# Altium PCB AGRSHUB_PCB.PcbDoc (part 1 of 2)
Units mil, origin at the board's own origin, x right, y up, seen from the top; angles counter-clockwise.
Board outline 4405 x 3410 mil, 2 copper layers (Top Layer, Bottom Layer); 159 components, 148 nets, 602 pads, 103 vias.
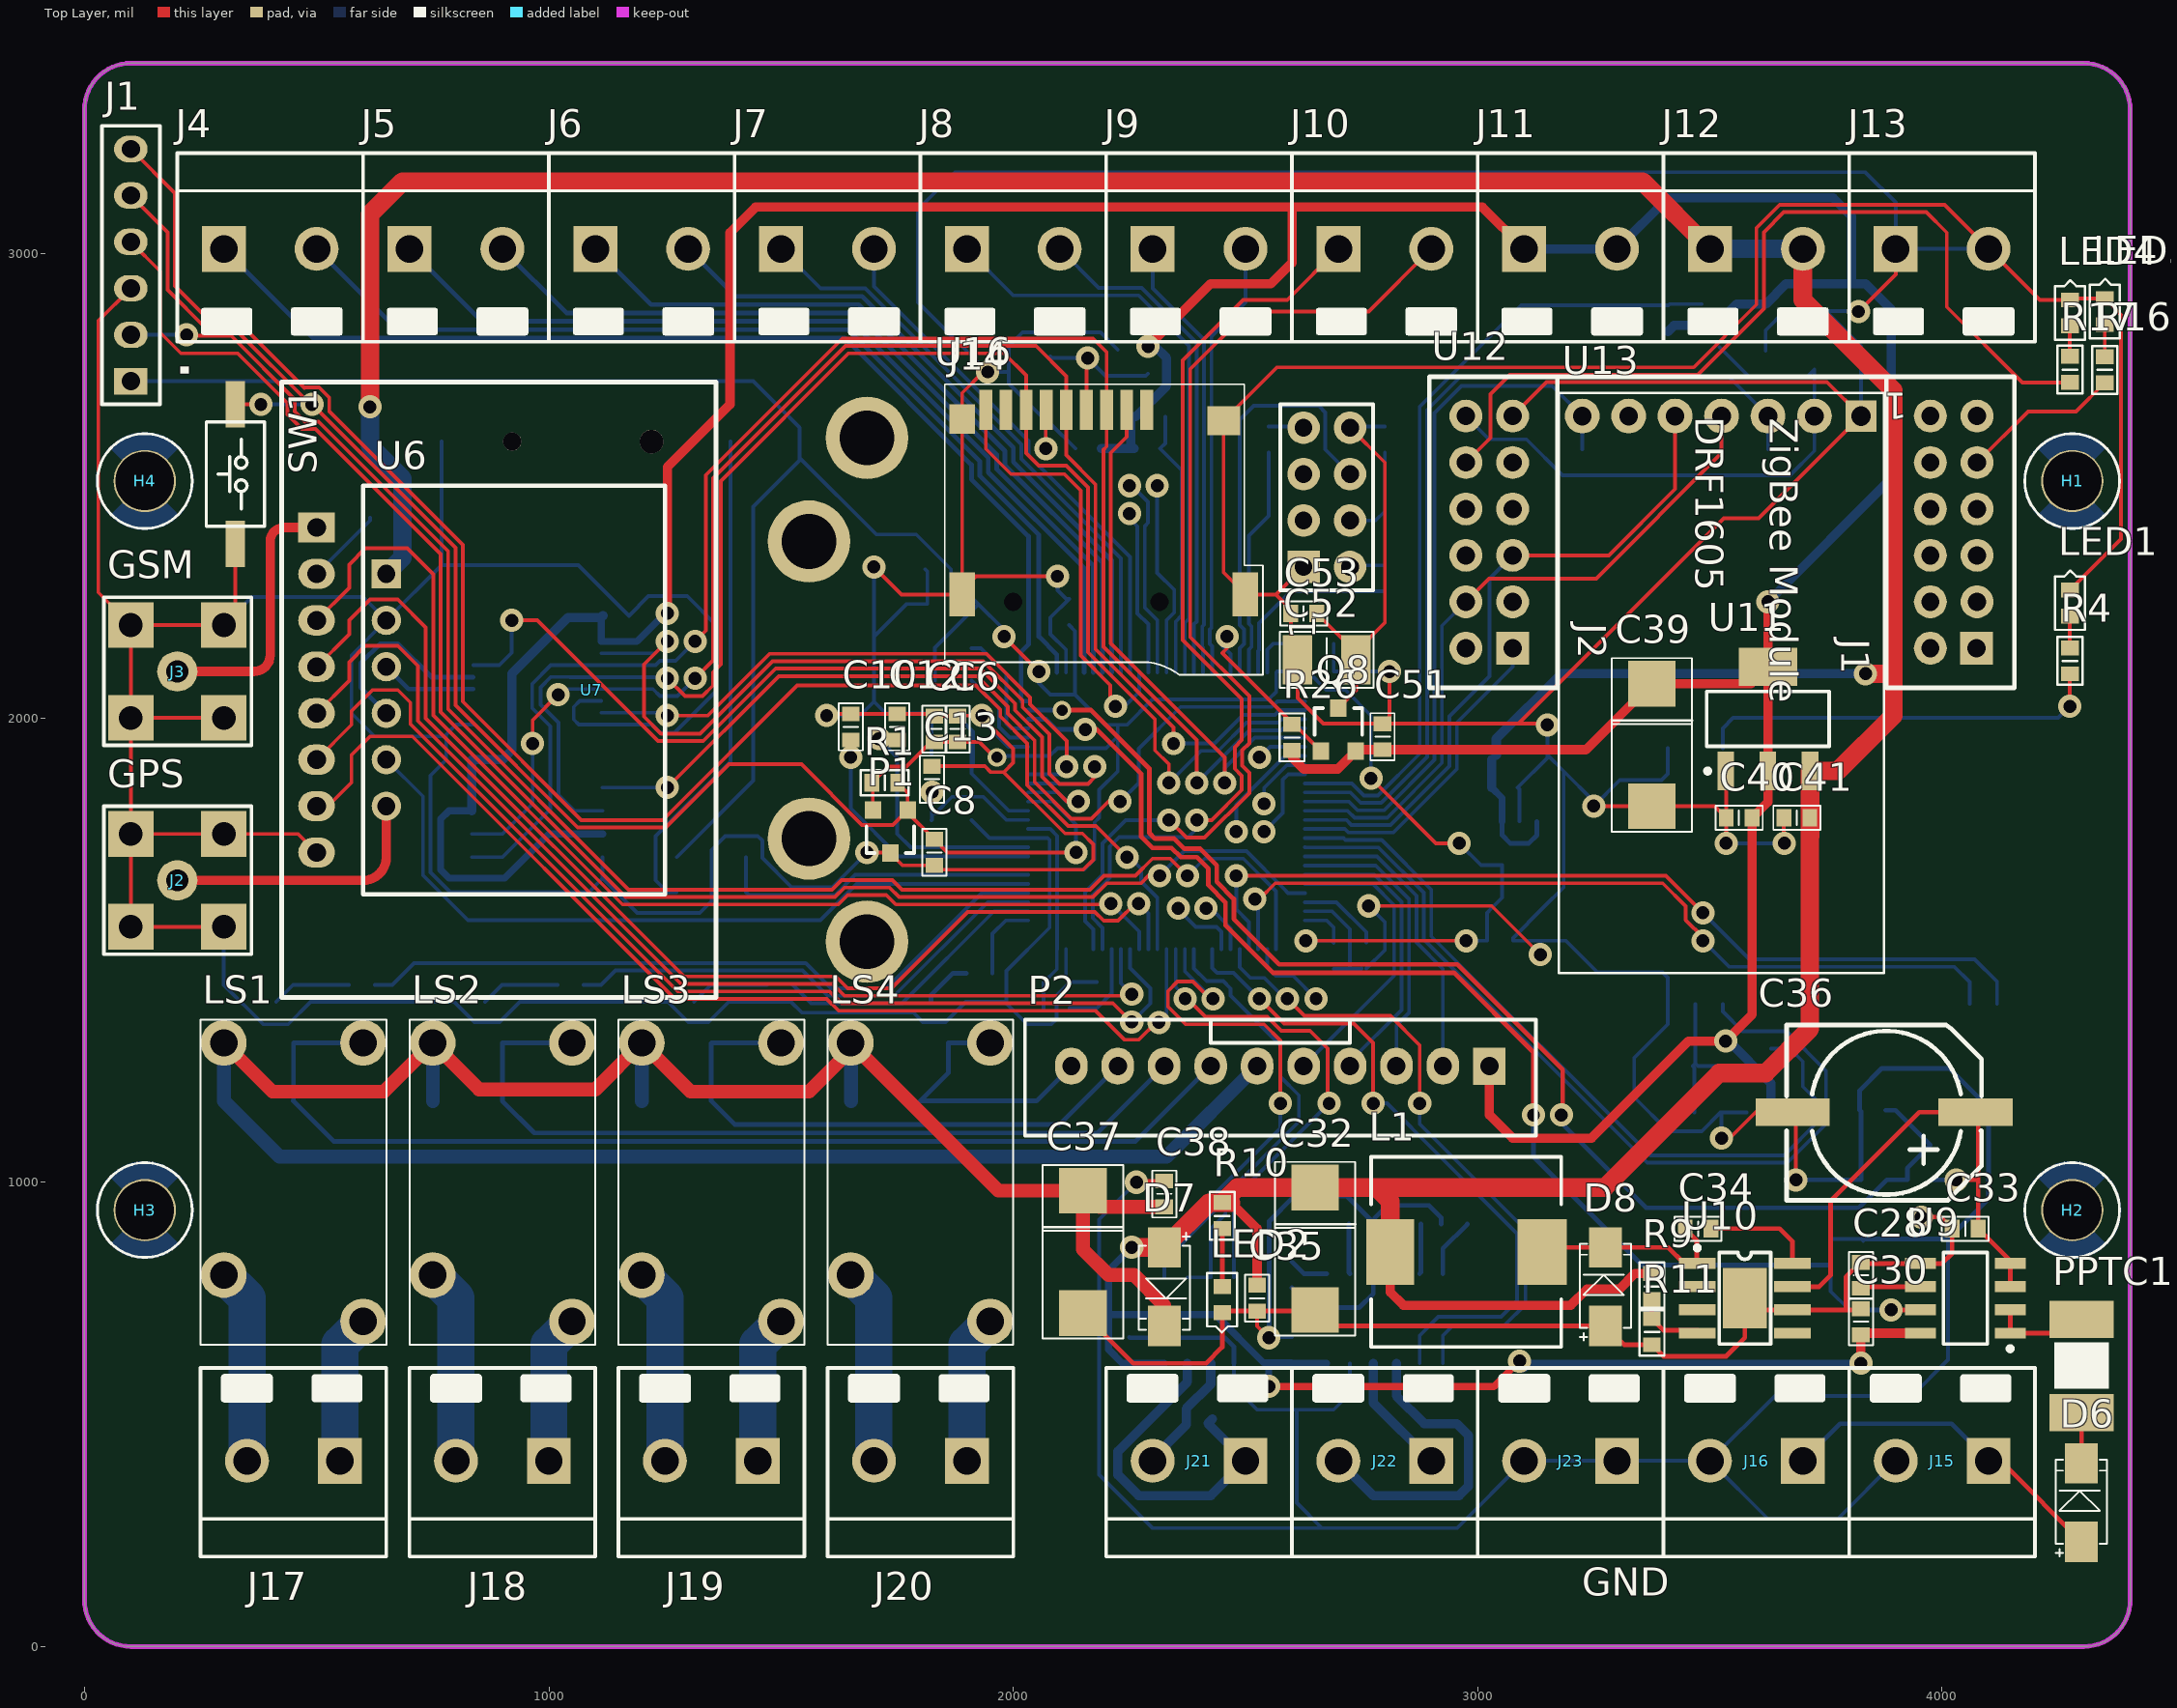
[diagram p0: Top Layer view]
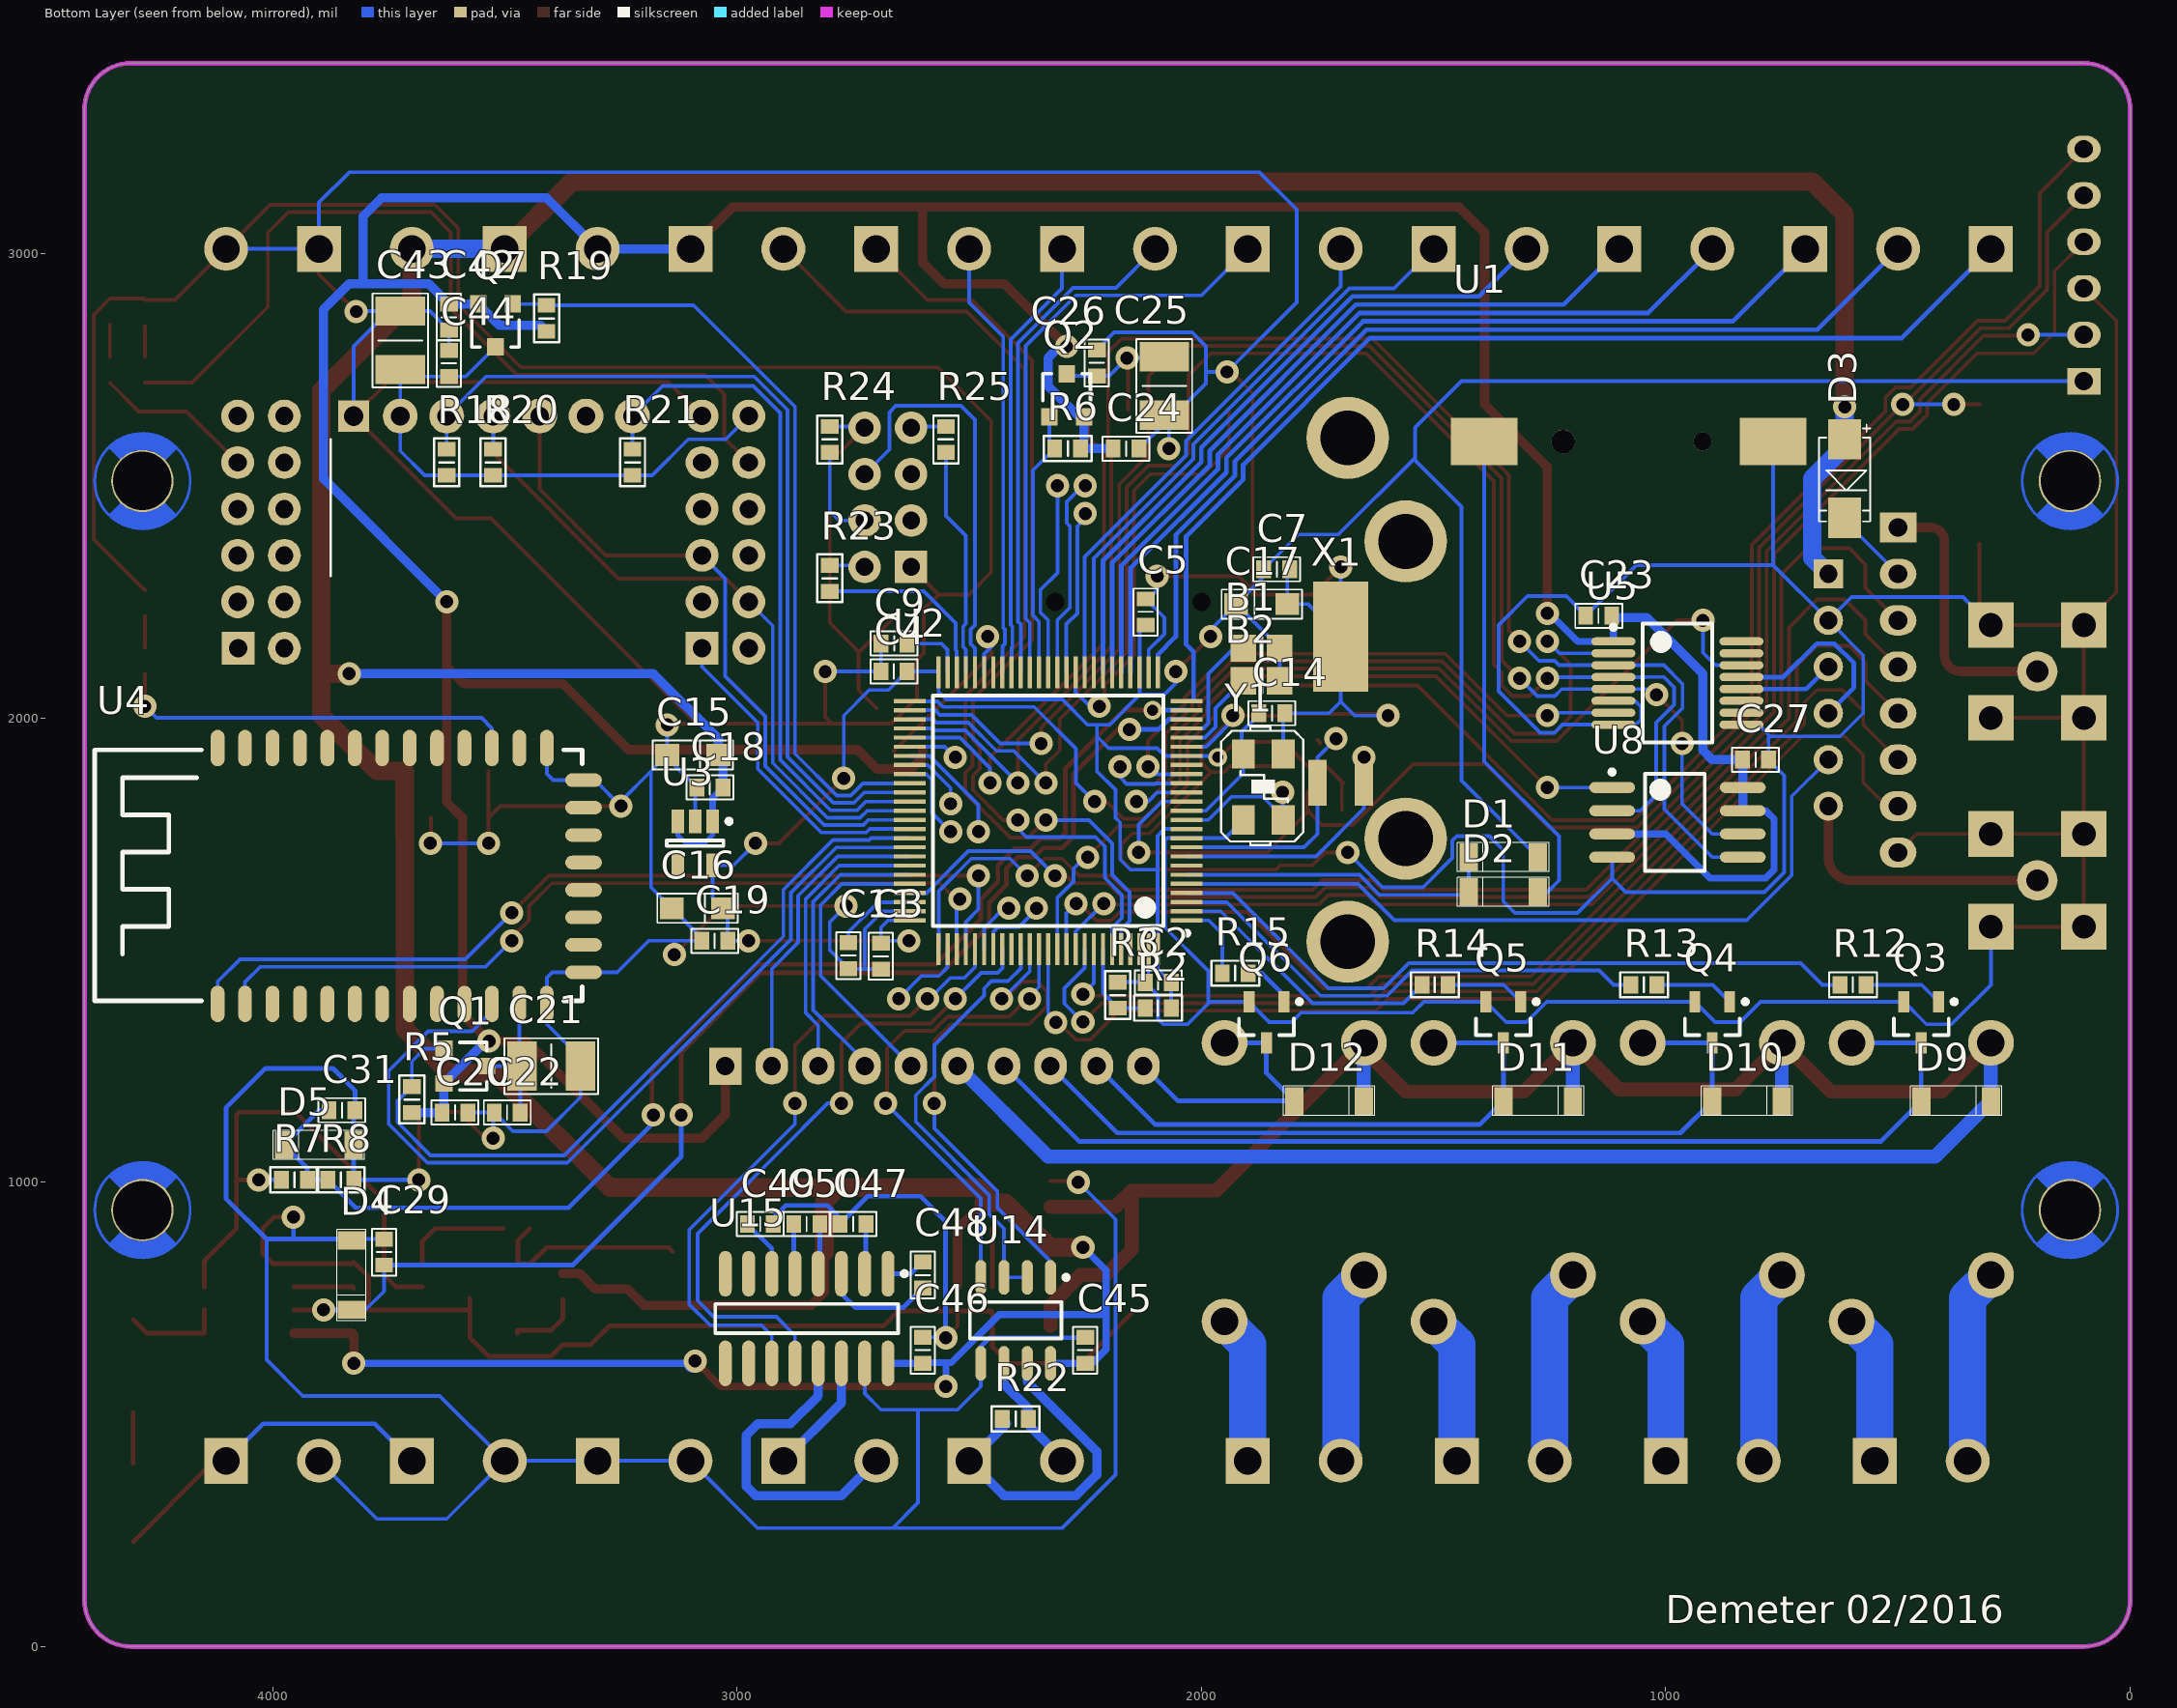
[diagram p1: Bottom Layer view, seen from below]
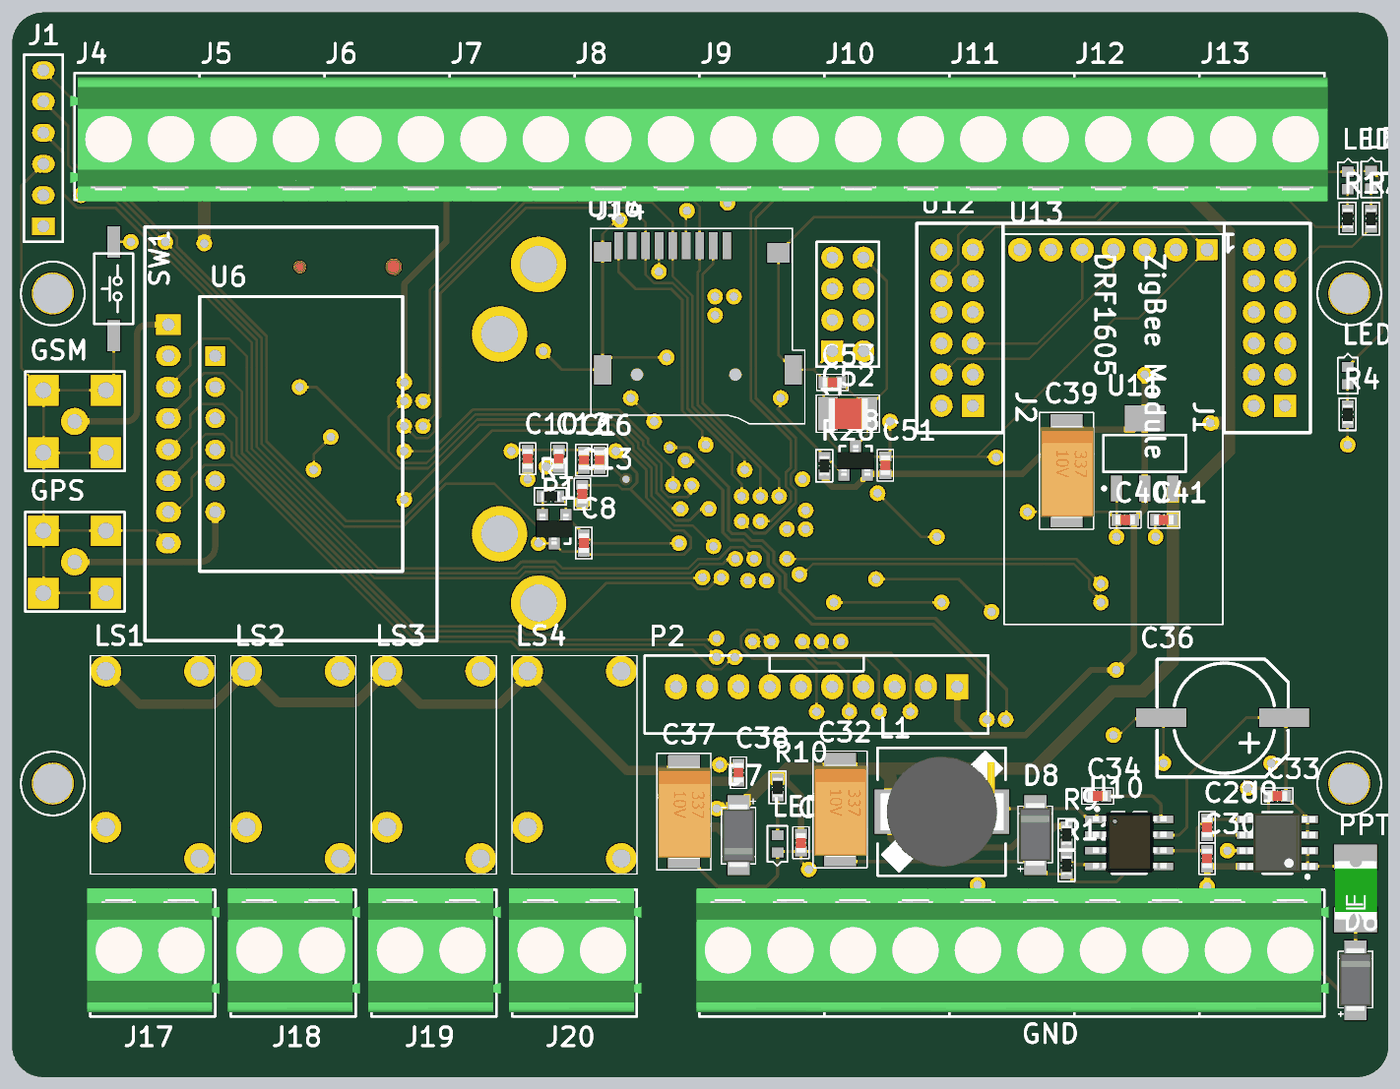
[diagram p3: 3D render of the assembled board from above, using the file's embedded part models]
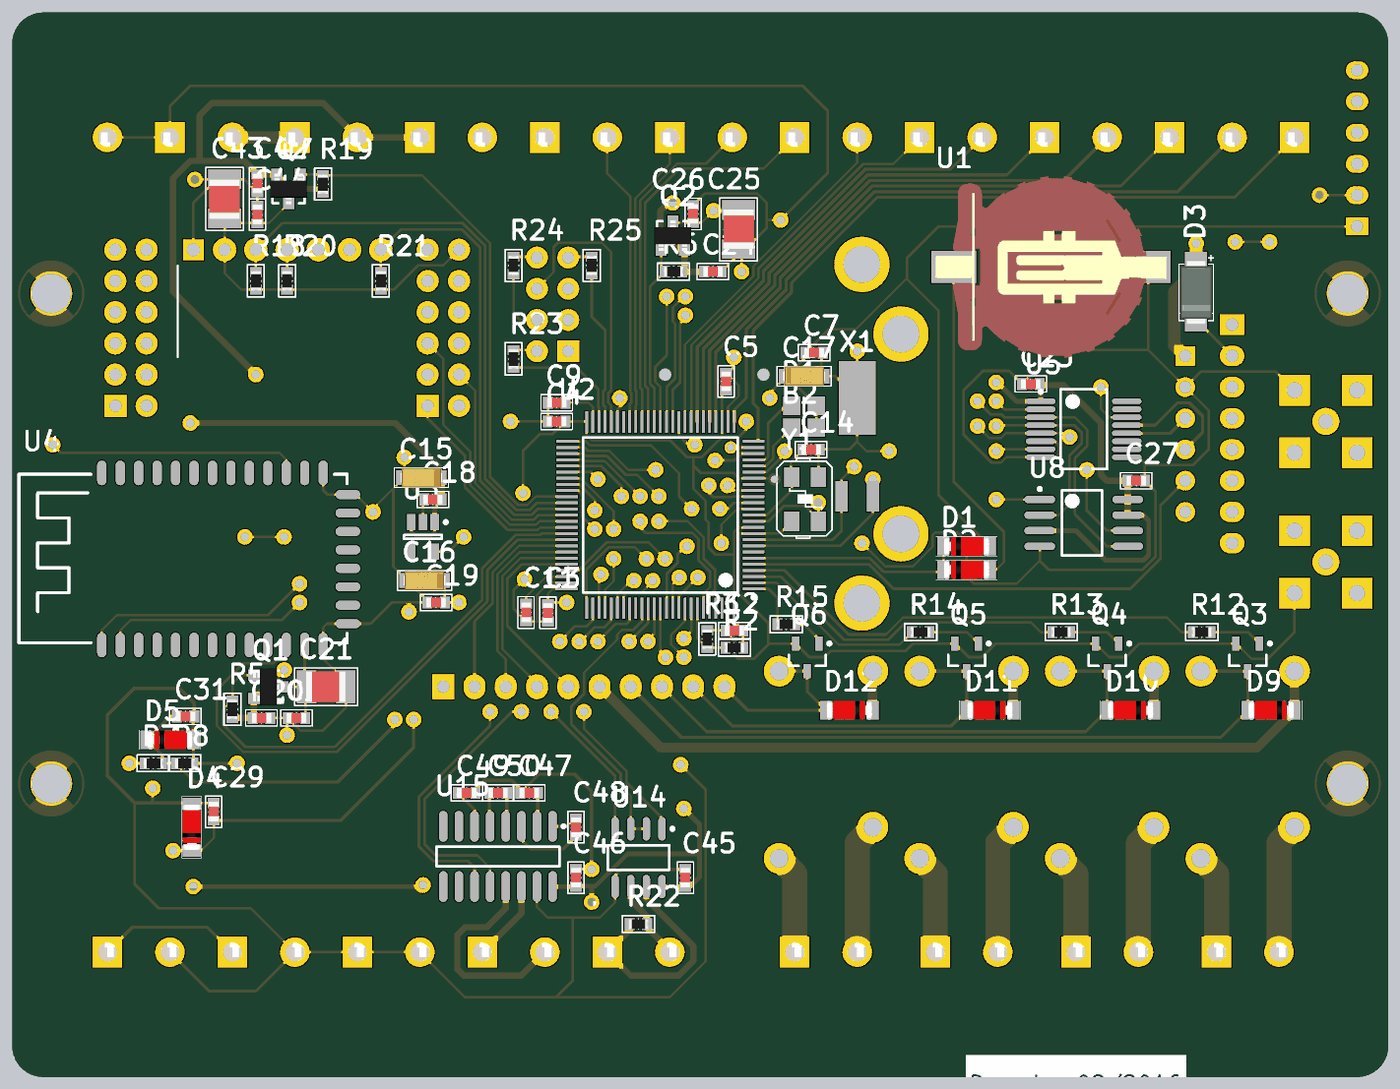
[diagram p4: 3D render of the assembled board from below, using the file's embedded part models]

## Layer stack, top to bottom
Top Solder: solder mask 0.4, Solder Resist, Dk 3.5
Top Layer: signal copper 1.4
Dielectric 1: dielectric 12.6, FR-4, Dk 4.8
Bottom Layer: signal copper 1.4
Bottom Solder: solder mask 0.4, Solder Resist, Dk 3.5

## Board outline
0,100 0,3310 cw(c100,3310) 100,3410 4305,3410 cw(c4305,3310) 4405,3310 4405,100 cw(c4305,100) 4305,0 100,0 cw(c100,100)

## Design rules (kind name [scope] priority, off if disabled: settings)
Clearance [All] p1: gap=8 except(7: SMDPad-SMDPad)
ComponentClearance [All] p1: gap=0 collisioncheckmode=3 verticalgap=0 showdistances=FALSE
PolygonConnect [All] p1: connectstyle=Relief reliefconductorwidth=10 reliefentries=4 polygonreliefangle="90 Angle" airgapwidth=10
RoutingVias [All] p1: holewidth=28 width=50 viastyle="Through Hole" minholewidth=28 minwidth=50 maxholewidth=28 maxwidth=50
SolderMaskExpansion [All] p1: expansion=4
Width [All] p1: maxlimit=100 minlimit=8 preferedwidth=8
29 further rules are at their usual default settings.

## Classes and differential pairs
component class WIFI: C51 C52 C53 Q8 R23 R24 R25 R26 U16
component class RSxx: C45 C46 C47 C48 C49 C50 J21 J22 J23 R22 U14 U15
component class RF: C42 C43 C44 LED3 LED4 Q7 R16 R17 R18 R19 R20 R21 U12 U13
component class RELAY: D9 D10 D11 D12 J17 J18 J19 J20 LS1 LS2 LS3 LS4 Q3 Q4 Q5 Q6 R12 R13 R14 R15
component class POWER: C28 C29 C30 C31 C32 C33 C34 C35 C36 C37 C38 C39 C40 C41 D4 D5 D6 D7 D8 J15 J16 L1 LED2 PPTC1 R7 R8 R9 R10 R11 U9 U10 U11
component class MEMORY: C24 C25 C26 C27 J14 Q2 R6 U8
component class INPUT: J4 J5 J6 J7 J8 J9 J10 J11 J12 J13
component class HOLE: H1 H2 H3 H4
component class GSM: D3 J3 U7
component class GPS: C23 J2 U5 U6
component class DISPLAY: P2
component class BLE: C20 C21 C22 LED1 Q1 R4 R5 U4
component class AGRSHub_Sche: B1 B2 C1 C2 C3 C4 C5 C6 C7 C8 C9 C10 C11 C12 C13 C14 C15 C16 C17 C18 C19 D1 D2 J1 P1 R1 R2 R3 SW1 U1 U2 U3 X1 Y1

## Components (designator, comment, footprint, x,y, rotation, side; value= is the part's Value field where it differs from the comment)
B1 "BEAD" 0805_M 1870.63,2150 r0 bottom
B2 "BEAD" 0805_M 1870.63,2080 r0 bottom
C1 "104" C0603 1830,1976.56 r270 top
C2 "104" C0603 2093.44,1430 r180 bottom
C3 "104" C0603 2690,1486.56 r90 bottom
C4 "104" C0603 2662.44,2100 r180 bottom
C5 "104" C0603 2120,2228.44 r270 bottom
C6 "104" C0603 1880,1976.56 r270 top
C7 "10 uF" C0603 1837.56,2320 r0 bottom
C8 "104" C0603 1830,1710 r90 top
C9 "105" C0603 2661.56,2160 r0 bottom
C10 "10p" C0603 1650,1980 r90 top
C11 "105" C0603 2760,1488.44 r270 bottom
C12 "10p" C0603 1750,1980 r90 top
C13 "10p" C0603 1825,1868.44 r270 top
C14 "10p" C0603 1847.56,2010 r0 bottom
C15 "Cap_TANTA" CAP_TANTA_SMD_10UF/10V/16V 3095.07,1920 r90 bottom
C16 "10 uF" CAP_TANTA_SMD_10UF/10V/16V 3085.07,1590 r90 bottom
C17 "10 uF" CAP_TANTA_SMD_10UF/10V/16V 1870,2245 r270 bottom
C18 "104" C0603 3058.44,1850 r180 bottom
C19 "104" C0603 3048.44,1520 r180 bottom
C20 "104" C0603 3606.56,1150 r0 bottom
C21 "10 uF" C1210 3400,1250 r0 bottom
C22 "104" C0603 3495,1150 r180 bottom
C23 "104" C0603 1145,2220 r180 bottom
C24 "104" C0603 2161.56,2580 r0 bottom
C25 "10 uF" C1210 2080,2715 r90 bottom
C26 "104" C0603 2225,2765 r270 bottom
C27 "104" C0603 806.56,1910 r0 bottom
C28 "103" C0603 3825,800 r270 top
C29 "103" C0603 3760,850 r270 bottom
C30 "104" C0603 3825,700 r270 top
C31 "103" C0603 3850,1155 r0 bottom
C32 "100 uF" CAP_TANTA_SMD_100UF/16V 2650,856.77 r180 top
C33 "104" C0603 4050,900 r180 top
C34 "470 pF" C0603 3475,900 r180 top
C35 "104" C0603 2525,750 r90 top
C36 "100 uF/35V" "CAP_AL_SMD (10X10.2)" 3875,1150 r180 top
C37 "100 uF" CAP_TANTA_SMD_100UF/16V 2150,850 r180 top
C38 "104" C0603 2325,975 r270 top
C39 "10 uF" CAP_TANTA_SMD_100UF/16V 3375,1941.77 r180 top
C40 "104" C0603 3562.56,1785 r0 top
C41 "104" C0603 3686.56,1785 r0 top
C42 "104" C0603 3620,2862.56 r90 bottom
C43 "10 uF" C1210 3725,2812.99 r270 bottom
C44 "104" C0603 3620,2763.44 r270 bottom
C45 "104" C0603 2250,638.44 r270 bottom
C46 "105" C0603 2600,638.44 r270 bottom
C47 "105" C0603 2750,910 r0 bottom
C48 "105" C0603 2600,800 r90 bottom
C49 "105" C0603 2950,910 r180 bottom
C50 "105" C0603 2850,910 r180 bottom
C51 "104" C0603 2795,1960 r270 top
C52 "10 uF" C1210 2675,2125 r0 top
C53 "104" C0603 2625,2225 r0 top
D1 "B340A" DO_213AA 1350,1700 r0 bottom
D2 "B340A" DO_213AA 1350,1625 r0 bottom
D3 "SS34" "DO-214AC (SMA)" 615,2515.43 r270 bottom
D4 "3V3" DO_213AA 3830,800 r270 bottom
D5 "3V3" DO_213AA 3900,1080 r0 bottom
D6 "SS34" "DO-214AC (SMA)" 4300,310 r90 top
D7 "B340A" "DO-214AC (SMA)" 2325,775 r270 top
D8 "B340A" "DO-214AC (SMA)" 3275,775 r90 top
D9 "B340A" DO_213AA 375,1175 r180 bottom
D10 "B340A" DO_213AA 825,1175 r180 bottom
D11 "B340A" DO_213AA 1275,1175 r180 bottom
D12 "B340A" DO_213AA 1725,1175 r180 bottom
H1 "HOLE" DE_VIT 4280,2510 r0 top
H2 "HOLE" DE_VIT 4280,940 r0 top
H3 "HOLE" DE_VIT 130,940 r0 top
H4 "HOLE" DE_VIT 130,2510 r0 top
J1 "ST Link" "HEADER 6" 100,2725 r90 top
J2 "SMA1-7569" "ANTENA STAND" 200,1650 r0 top
J3 "SMA1-7569" "ANTENA STAND" 200,2100 r0 top
J4 "AIN" "DOMINO NORMAL 2" 400,3010 r0 top
J5 "AIN" "DOMINO NORMAL 2" 800,3010 r0 top
J6 "AIN" "DOMINO NORMAL 2" 1200,3010 r0 top
J7 "IN" "DOMINO NORMAL 2" 1600,3010 r0 top
J8 "IN" "DOMINO NORMAL 2" 2000,3010 r0 top
J9 "IN" "DOMINO NORMAL 2" 2400,3010 r0 top
J10 "I2C BUS" "DOMINO NORMAL 2" 2800,3010 r0 top
J11 "3V3" "DOMINO NORMAL 2" 3200,3010 r0 top
J12 "5V" "DOMINO NORMAL 2" 3600,3010 r0 top
J13 "GND" "DOMINO NORMAL 2" 4000,3010 r0 top
J14 "MicroSD card" "MICROSD SOCKET CPSDBT5" 2287.4,2663.38 r0 top
J15 "DC IN" "DOMINO NORMAL 2" 4000,400 r180 top
J16 "DC IN" "DOMINO NORMAL 2" 3600,400 r180 top
J17 "OUT1" "DOMINO NORMAL 2" 450,400 r180 top
J18 "OUT3" "DOMINO NORMAL 2" 900,400 r180 top
J19 "OUT2" "DOMINO NORMAL 2" 1350,400 r180 top
J20 "OUT4" "DOMINO NORMAL 2" 1800,400 r180 top
J21 "RS485" "DOMINO NORMAL 2" 2400,400 r180 top
J22 "232" "DOMINO NORMAL 2" 2800,400 r180 top
J23 "GND" "DOMINO NORMAL 2" 3200,400 r180 top
L1 "68uH-20%" L10.4W10.4H4.8 2975,850 r180 top
LED1 "BLUE" SM/LED_0603 4275,2247 r90 top
LED2 "POWER" SM/LED_0603 2450,747 r270 top
LED3 "LED1" SM/LED_0603 4350,2875 r90 top
LED4 "LED2" SM/LED_0603 4275,2872 r90 top
LS1 "RELAY SPDT 4P 5V" RELAY_4PIN_5A_12 300,1300 r270 top
LS2 "RELAY SPDT 4P 5V" RELAY_4PIN_5A_12 750,1300 r270 top
LS3 "RELAY SPDT 4P 5V" RELAY_4PIN_5A_12 1200,1300 r270 top
LS4 "RELAY SPDT 4P 5V" RELAY_4PIN_5A_12 1650,1300 r270 top
P1 "MCP120/130" SOT23-3 1735,1755 r180 top
P2 "Header 10" BUS_10 2575,1250 r0 top
PPTC1 "KMC5S110-33" PTC1812 4300,610 r90 top
Q1 "BSS84" SOT23-3 3585,1250 r270 bottom
Q2 "BSS84" SOT23-3 2290,2695 r180 bottom
Q3 "C1815" SOT-23B_N 450,1344.29 r270 bottom
Q4 "C1815" SOT-23B_N 900,1344.29 r270 bottom
Q5 "C1815" SOT-23B_N 1350,1344.29 r270 bottom
Q6 "C1815" SOT-23B_N 1860,1344.29 r270 bottom
Q7 "BSS84" SOT23-3 3520,2845 r0 bottom
Q8 "BSS84" SOT23-3 2700,1975 r0 top
R1 "10k" R0603 1723.44,1860 r180 top
R2 "10k" R0603 2093.44,1375 r180 bottom
R3 "220" R0603 2180,1402.56 r90 bottom
R4 "1k" R0603 4275,2122.44 r90 top
R5 "10k" R0603 3700,1177.56 r90 bottom
R6 "10k" R0603 2287.56,2580 r0 bottom
R7 "1k-1%" R0603 3952.56,1005 r0 bottom
R8 "1k-1%" R0603 3852.56,1005 r0 bottom
R9 "1k-1%" R0603 3375,775 r90 top
R10 "1k" R0603 2450,927.56 r90 top
R11 "1k-1%" R0603 3375,677.56 r90 top
R12 "1k-5%" R0603 597.44,1425 r180 bottom
R13 "1k-5%" R0603 1047.44,1425 r180 bottom
R14 "1k-5%" R0603 1497.44,1425 r180 bottom
R15 "1k-5%" R0603 1927.44,1450 r180 bottom
R16 "1k" R0603 4350,2750 r270 top
R17 "1k" R0603 4275,2750 r90 top
R18 "10k" R0603 3625,2550 r90 bottom
R19 "10k" R0603 3410,2860 r90 bottom
R20 "10k" R0603 3525,2550 r90 bottom
R21 "10M" R0603 3225,2550 r90 bottom
R22 "150" R0603 2400,490 r0 bottom
R23 "47" R0603 2800,2300 r90 bottom
R24 "10k" R0603 2800,2600 r270 bottom
R25 "47" R0603 2550,2600 r270 bottom
R26 "10k" R0603 2600,1957.56 r90 top
SW1 "SW 2P" "SW TACT" 325,2525 r90 top
U1 "3V" "BAT CR1220 Holder" 1080,2595 r0 bottom
U2 "STM32F4_LQFP100" TSQFP50P1600X1600X160-100N 2330,1800 r0 bottom
U3 "XC6209B332MRN_SOT-25" SOT23-5 3090,1730 r270 bottom
U4 "HM-10 MODULE" "HC-05 BREAKOUT" 3724.23,1659.42 r90 bottom
U5 "SC16IS7x0" SSOP16_M 975,2075 r180 bottom
U6 "GPS MODULE" "GPS DEMETER" 1105,2060 r270 top
U7 "SIM900 MODULE" "SIM900 DEMETER" 1092.5,2060.5 r0 top
U8 "MX25L8005MC-15G_SOP-8L" FLASH_IC 975,1775 r180 bottom
U9 "ACS714" SOIC-8N 4050,750 r180 top
U10 "TPS54xx" HSOIOCN 3575,750 r270 top
U11 "LM1117" SOT223_L 3625,1997.8 r90 top
U12 "DRF1605" DRF1605 2895.87,2734.65 r270 top
U13 "APC320" "APC320 - 2D" 3825,2650 r180 top
U14 "SP485EEN" SO8_L 2400,702.52 r270 bottom
U15 "MAX232" SOIC16_M 2850,706.46 r270 bottom
U16 "ESP8266 V1" "ESP8266 MODULE" 2625,2325 r90 top
X1 "Crystal1" "Crystal cylinder" 1650,1860 r270 bottom
Y1 "8MHZ" "CRYSTAL 5032" 1867,1851 r90 bottom

## Footprints (in the part's own frame and the unit in brackets; to place one, negate y for a bottom-side part, rotate by r counter-clockwise, add the part's x,y. Pads: shape width x height; smd on the part's side, far side on the other; paste and mask are expansions set on the pad)
0805_M [mm] "Chip Resistor, Body 2.0x1.2mm, IPC Low Density"
  rect 1.4x1.5 smd: 1(-1,0) 2(1,0)
  silkscreen extent 0,-0.65 0,0.65, body extent -1.07,-0.7 1.07,0.7, height 0.7
"ANTENA STAND" [mm] "Connector; Header; 2 Position"
  round 2.2 hole 1.2: 1(0,0)
  rect 2.5x2.5 hole 1.3: 2(-2.54,-2.54) 3(2.54,-2.54) 4(2.54,2.54) 5(-2.54,2.54)
  silkscreen extent -4.01,-4.04 4.06,4.06
"APC320 - 2D" [mil]
  rect 67x67 hole 42: 1(0,0)
  round 75 / inner round 62 / far side round 75 hole 40: 2(100,0) 3(200,0) 4(300,0) 5(400,0) 6(500,0) 7(600,0)
  silkscreen extent -50,-50 650,1200
"BAT CR1220 Holder" [mm]
  rect 3.66x2.6 smd: 1(7.9,0) 2(-7.9,0)
  round 1 hole 1 paste+0: ""(-4.039,0)
  round 1.3 hole 1.3 paste+0: ""(3.581,0)
  body extent -9.4,-7.37 9.4,7.38, height 4.26
BUS_10 [mil]
  rect 70x80 hole 39.37: 1(450,0)
  oval 70x80 hole 39.37: 2(350,0) 3(250,0) 4(150,0) 5(50,0) 6(-50,0) 7(-150,0) 8(-250,0) 9(-350,0) 10(-450,0)
  silkscreen extent -550,-150 550,100
C0603 [mil]
  rect 32x38 smd: 1(-27.56,0) 2(28.44,0)
  silkscreen extent -50,-26 51,26, body extent -31,-16 31,16, height 12
C1210 [mm] "Chip Capacitor; Body 3.2 x 2.5 mm (LxW typ)"
  rect 1.6x2.7 smd: 1(-1.6,0) 2(1.6,0)
  silkscreen extent -2.57,-1.52 2.57,1.52, body extent -1.57,-1.26 1.63,1.24, height 0.92
"CAP_AL_SMD (10X10.2)" [mil]
  rect 160x59.03 smd: 1(-196.63,-0.99) 2(196.86,-0.99)
  silkscreen extent -210,-189 210,189, body extent -197,-198 197,196, height 402
CAP_TANTA_SMD_10UF/10V/16V [mil]
  rect 47.23x51.17 smd: 1(0,-55.07) 2(0,55.07)
  silkscreen extent -31,-87 31,87, body extent -32,-67 31,67, height 63
CAP_TANTA_SMD_100UF/16V [mil]
  rect 102.37x98.43 smd: 1(0,-131.77) 2(0,131.77)
  silkscreen extent -87,-187 87,187, body extent -87,-144 83,152, height 110
"CRYSTAL 5032" [mil]
  rect 62.99x49.21 smd: 1(-71,-43) 2(71,-43) 3(71,43) 4(-71,43)
  silkscreen extent -125,-87 129,90
"Crystal cylinder" [mm] "Crystal footsprint type 1"
  rect 2.5x1 smd: 1(0,0) 2(0,-2.54)
  rect 6x3 smd: 3(-8,-1.27)
  body extent -10.02,-2.6 0.53,0.07, height 2.3
DE_VIT [mil]
  round 134 hole 126: 1(0,0)
  Bottom Layer circle w6: c0,0 r102.73
  Bottom Layer region: 10.04,104.52 10.08,104.53 23.08,102.53 23.12,102.51 23.16,102.52 33.16,99.52 33.17,99.51 33.19,99.51 41.19,96.51 41.21,96.49 41.24,96.48 53.24,90.48 53.26,90.47 53.28,90.46 58.28,87.46 58.3,87.44 58.32,87.43 66.32,81.43 66.35,81.4 66.38,81.38 70.36,77.41 74.32,74.43 74.35,74.4 74.38,74.38 74.45,74.22 74.54,74.08 74.53,74.04 74.54,74 74.48,73.84 74.43,73.68 74.4,73.65 74.38,73.62 47.38,46.62 47,46.46 46.62,46.62 41.64,51.59 37.7,54.55 32.72,57.54 27.77,60.51 21.83,62.49 21.8,62.51 21.76,62.52 17.81,64.49 13.89,65.47 7.96,66.46 -7.96,66.46 -13.88,65.47 -20.83,63.49 -28.76,60.51 -33.71,57.54 -39.7,53.55 -39.73,53.54 -39.76,53.52 -41.68,52.56 -48.62,45.62 -49,45.46 -49.38,45.62 -75.38,71.62 -75.44,71.76 -75.53,71.89 -75.52,71.95 -75.54,72 -75.48,72.15 -75.45,72.3 -73.45,75.3 -73.36,75.36 -73.3,75.45 -70.31,77.44 -66.36,80.41 -61.38,85.38 -61.33,85.4 -61.3,85.45 -55.3,89.45 -55.27,89.46 -55.24,89.48 -35.24,99.48 -35.17,99.49 -35.12,99.53 -26.12,101.53 -26.11,101.53 -26.11,101.53 -16.11,103.53 -16.07,103.52 -16.04,103.54 -3.04,104.54 -3.02,104.53 -3,104.54 10,104.54
  Bottom Layer region: 47.05,-47.48 47.11,-47.47 47.24,-47.56 47.38,-47.62 73.38,-73.62 73.54,-74 73.38,-74.38 66.38,-81.38 66.33,-81.4 66.3,-81.45 63.31,-83.44 59.32,-86.43 59.3,-86.44 59.28,-86.46 54.3,-89.45 50.32,-92.43 50.24,-92.46 50.17,-92.51 44.23,-94.49 39.28,-97.46 39.22,-97.47 39.17,-97.51 33.21,-99.5 31.24,-100.48 31.17,-100.49 31.11,-100.53 26.12,-101.53 18.13,-103.52 18.12,-103.52 18.11,-103.53 13.11,-104.53 13.05,-104.52 13,-104.54 -8,-104.54 -8.04,-104.53 -8.08,-104.54 -15.08,-103.54 -15.09,-103.53 -15.11,-103.53 -25.11,-101.53 -25.13,-101.52 -25.15,-101.52 -32.15,-99.52 -32.17,-99.51 -32.19,-99.51 -40.19,-96.51 -40.21,-96.49 -40.24,-96.48 -54.24,-89.48 -54.26,-89.47 -54.28,-89.46 -59.28,-86.46 -59.3,-86.43 -59.35,-86.42 -65.34,-81.42 -69.31,-78.44 -72.3,-76.45 -72.33,-76.4 -72.38,-76.38 -74.38,-74.38 -74.54,-74 -74.38,-73.62 -48.38,-47.62 -48.27,-47.57 -48.17,-47.49 -48.08,-47.49 -48,-47.46 -47.88,-47.51 -47.76,-47.52 -45.76,-48.52 -45.7,-48.58 -45.62,-48.62 -43.66,-50.58 -40.7,-52.55 -40.67,-52.6 -40.62,-52.62 -38.66,-54.58 -35.73,-56.53 -33.79,-57.5 -30.83,-58.49 -30.8,-58.51 -30.76,-58.52 -26.78,-60.51 -21.8,-62.5 -16.85,-64.48 -11.89,-65.47 -11.88,-65.48 -11.87,-65.48 -7.93,-66.46 6.96,-66.46 12.89,-65.47 16.87,-64.48 20.83,-63.48 25.78,-61.51 29.74,-59.53 34.72,-56.54 34.72,-56.54 39.66,-53.57 43.62,-49.62 43.67,-49.6 43.7,-49.55 46.7,-47.55 46.85,-47.52 47,-47.46
  silkscreen extent -102,-102 102,102
"DO-214AC (SMA)" [mm]
  rect 2.2x1.8 smd: 1(-2.148,0) 2(2.148,0)
  silkscreen extent -2.95,-1.4 2.35,1.4, body extent -2.55,-1.3 2.65,1.3, height 2.3
DO_213AA [mil]
  rect 39.37x59.03 smd: 1(-74.73,0) 2(74.73,0)
  silkscreen extent -98,-31 98,31, body extent -73,-31 73,31, height 64
"DOMINO NORMAL 2" [mm]
  rect 2.4x2.5 hole 1.5: 1(-2.54,0)
  round 2.4 hole 1.5: 2(2.54,0)
  silkscreen extent -5.08,-5.08 5.08,5.24, body extent -5.43,-5.2 5.33,4.9, height 13.81
DRF1605 [mm]
  rect 1.8x1.8 hole 1: 1(14.85,29.925) 13(14.85,4.55)
  round 1.8 hole 1: 2(14.85,27.4) 3(12.31,29.95) 4(12.31,27.4) 5(9.77,29.95) 6(9.77,27.4) 7(7.23,29.95) 8(7.23,27.4) 9(4.69,29.95) 10(4.69,27.4) 11(2.15,29.95) 12(2.15,27.4) 14(14.85,2) 15(12.31,4.55) 16(12.31,2) 17(9.77,4.55) 18(9.77,2) 19(7.23,4.55) 20(7.23,2) 21(4.69,4.55) 22(4.69,2) 23(2.15,4.55) 24(2.15,2)
  silkscreen extent 0,0 17.03,32
"ESP8266 MODULE" [mil]
  rect 70x70 hole 38: 1(0,0)
  round 70 hole 38: 2(0,-100) 3(100,0) 4(100,-100) 5(200,0) 6(200,-100) 7(300,0) 8(300,-100)
  silkscreen extent -50,-150 350,50, body extent -104,-154 404,804, height 25
FLASH_IC [mm] "SOIC, 8-Leads, Body 5.3x5.3mm (max), Pitch 1.27mm, IPC Medium Density"
  oval 2.5x0.6 smd: 1(-3.575,1.905) 2(-3.575,0.635) 3(-3.575,-0.635) 4(-3.575,-1.905) 5(3.575,-1.905) 6(3.575,-0.635) 7(3.575,0.635) 8(3.575,1.905)
  silkscreen extent -3.7,-2.65 1.49,2.88, body extent -2.64,-2.64 2.64,2.64, height 1.1
"GPS DEMETER" [mm]
  rect 1.6x1.6 hole 0.991: 1(-6.35,-11.557)
  round 1.6 hole 0.991: 2(-3.81,-11.557) 3(-1.27,-11.557) 4(1.27,-11.557) 5(3.81,-11.557) 6(6.35,-11.557)
  round 4.5 hole 3: 7(-8.128,11.557) 8(8.128,11.557)
  silkscreen extent -11.18,-12.83 11.18,3.68
"HC-05 BREAKOUT" [mm]
  oval 2x0.75 smd: 1(-7,10.004) 2(-7,8.504) 3(-7,7.004) 4(-7,5.505) 5(-7,4.005) 6(-7,2.505) 7(-7,1.005) 8(-7,-0.495) 9(-7,-1.995) 10(-7,-3.495) 11(-7,-4.994) 12(-7,-6.494) 13(-7,-7.994) 22(7,-7.994) 23(7,-6.494) 24(7,-4.994) 25(7,-3.495) 26(7,-1.995) 27(7,-0.495) 28(7,1.005) 29(7,2.505) 30(7,4.005) 31(7,5.505) 32(7,7.004) 33(7,8.504) 34(7,10.004)
  oval 0.75x2 smd: 14(-5.265,-10.004) 15(-3.764,-10.004) 16(-2.263,-10.004) 17(-0.762,-10.004) 18(0.739,-10.004) 19(2.24,-10.004) 20(3.742,-10.004) 21(5.243,-10.004)
  silkscreen extent -6.82,-9.93 6.9,16.74
"HEADER 6" [mil]
  rect 57x72 hole 39: 1(0,0)
  oval 57x72 hole 39: 2(100,0) 3(200,0) 4(300,0) 5(400,0) 6(500,0)
  silkscreen extent -50,-62 550,63
HSOIOCN [mm] "SP7656"
  rect 0.6x2 smd: 1(-1.905,-2.6) 2(-0.635,-2.6) 3(0.635,-2.6) 4(1.905,-2.6) 5(1.905,2.6) 6(0.635,2.6) 7(-0.635,2.6) 8(-1.905,2.6)
  rect 3.3x2.4 smd: 9(0,0)
  silkscreen extent -2.88,-2.72 2.5,1.41, body extent -2.5,-2.95 2.4,3.05, height 1.7
L10.4W10.4H4.8 [mm]
  rect 2.7x3.6 smd: 1(-4.15,0)
  rect 2.6x3.6 smd: 2(4.15,0)
  silkscreen extent -5.2,-5.2 5.2,5.2, body extent -5.04,-5 4.96,5, height 4.7
"MICROSD SOCKET CPSDBT5" [mil]
  rect 27.53x86.6 smd: 1(0,0) 2(-43.3,0) 3(-86.6,0) 4(-129.92,0) 5(-173.22,0) 6(-216.53,0) 7(-259.83,0) 8(-303.13,0) 9(-346.45,0)
  rect 55.1x62.97 smd: 10(-397.63,-19.68)
  rect 55.1x94.47 smd: 11(-397.63,-397.63) 12(212.58,-397.63)
  rect 70.83x62.97 smd: 13(165.35,-23.62)
  round 0 hole 39.37: 14(27.55,-413.38) 15(-287.4,-413.38)
  silkscreen extent -435,-571 250,55
PTC1812 [mm]
  rect 2.032x3.5 smd: 1(-2.7,0) 2(2.395,0)
  silkscreen extent -1.4,-1.5 1.14,1.5, body extent -2.67,-1.73 2.06,1.68, height 1.34
R0603 [mil]
  rect 32x38 smd: 1(-27.56,0) 2(28.44,0)
  silkscreen extent -51,-27 52,27, body extent -31,-16 31,16, height 18
RELAY_4PIN_5A_12 [mm]
  round 2.5 hole 1.5: 1(0,0) 2(0,7.62) 3(12.7,0) 4(15.24,7.62)
  silkscreen extent -1.27,-1.27 16.51,8.89, body extent -1.4,-1.4 16.64,9.02, height 15.24
"SIM900 DEMETER" [mil]
  rect 79x65 hole 40: 1(-592.5,349.5)
  oval 79x65 hole 40: 2(-592.5,249.5) 3(-592.5,149.5) 4(-592.5,49.5) 5(-592.5,-50.5) 6(-592.5,-150.5) 7(-592.5,-250.5) 8(-592.5,-350.5)
  round 177.17 hole 118.11: 9(592.5,542.5) 10(592.5,-542.5)
  silkscreen extent -667,-662 268,663
SM/LED_0603 [mil]
  rect 32x38 smd: 1(-28,0) 2(28,0)
  silkscreen extent -58,-32 70,32, body extent -30,-20 30,20, height 31
SO8_L [mm] "SOIC, 8-Leads, Body 4.9x3.9mm, Pitch 1.27mm, IPC High Density"
  oval 1.9x0.6 smd: 1(-2.35,1.905) 2(-2.35,0.635) 3(-2.35,-0.635) 4(-2.35,-1.905) 5(2.35,-1.905) 6(2.35,-0.635) 7(2.35,0.635) 8(2.35,1.905)
  silkscreen extent -2.47,-2.5 1,2.88, body extent -2,-2.5 2,2.5, height 1.75
SOIC16_M [mm] "SOIC, 16-Leads, Body 9.9x3.9mm, Pitch 1.27mm, IPC Low Density"
  oval 2.5x0.7 smd: 1(-2.45,4.445) 2(-2.45,3.175) 3(-2.45,1.905) 4(-2.45,0.635) 5(-2.45,-0.635) 6(-2.45,-1.905) 7(-2.45,-3.175) 8(-2.45,-4.445) 9(2.45,-4.445) 10(2.45,-3.175) 11(2.45,-1.905) 12(2.45,-0.635) 13(2.45,0.635) 14(2.45,1.905) 15(2.45,3.175) 16(2.45,4.445)
  silkscreen extent -2.57,-5 0.8,5.47, body extent -2,-5 2,5, height 1.91
SOIC-8N [mm] "SOIC, 8-Leads, Body 4.9x3.9mm, Pitch 1.27mm, IPC High Density"
  rect 1.7x0.6 smd: 1(-2.45,1.905) 2(-2.45,0.635) 3(-2.45,-0.635) 4(-2.45,-1.905) 5(2.45,-1.905) 6(2.45,-0.635) 7(2.45,0.635) 8(2.45,1.905)
  silkscreen extent -2.58,-2.5 1.2,2.88, body extent -3.1,-2.41 3.1,2.41, height 1.7
SOT23-3 [mm] "SOT-23; 3 Leads; Body 3.1 x 2.5 mm, inc. leads (LxW max)"
  rect 0.9x0.95 smd: 1(-0.95,-1.175) 2(0.95,-1.175) 3(0,1.175)
  silkscreen extent -1.3,-0.3 1.3,1.18, body extent -1.5,-1.25 1.5,1.25, height 1.08
SOT23-5 [mm] "SOT23, 5-Leads, Body 2.9x1.6mm, Pitch 0.95mm, Lead Span 2.8mm, IPC Low Density"
  rect 1.3x0.7 smd: 1(-1.2,0.95) 2(-1.2,0) 3(-1.2,-0.95) 4(1.2,-0.95) 5(1.2,0.95)
  silkscreen extent -1.32,-1.55 0.15,1.97, body extent -0.9,-1.55 0.9,1.55, height 1.45
SOT223_L [mm] "SOT223, 4-Leads, Body 6.5x3.5mm, Pitch 2.3mm, Lead Span 7mm, IPC High Density"
  rect 2.1x0.9 smd: 1(-2.85,2.3) 2(-2.85,0) 3(-2.85,-2.3)
  rect 2.1x3.2 smd: 4(2.85,0)
  silkscreen extent -2.97,-3.35 1.5,3.42, body extent -1.85,-3.35 1.85,3.35, height 1.7
SOT-23B_N [mm] "SOT23, 3-Leads, Body 2.9x1.3mm, Pitch 0.95mm, Lead Span 2.4mm, IPC Medium Density"
  rect 1.15x0.6 smd: 1(-1.125,0.95) 2(-1.125,-0.95) 3(1.125,0)
  silkscreen extent -1.25,-1.5 0.7,1.92, body extent -0.7,-1.5 0.7,1.5, height 1.14
SSOP16_M [mm] "SOP, 16-Leads, Body 6.2x5.3mm, Pitch 0.65mm, IPC Low Density"
  oval 2.4x0.45 smd: 1(-3.5,2.275) 2(-3.5,1.625) 3(-3.5,0.975) 4(-3.5,0.325) 5(-3.5,-0.325) 6(-3.5,-0.975) 7(-3.5,-1.625) 8(-3.5,-2.275) 9(3.5,-2.275) 10(3.5,-1.625) 11(3.5,-0.975) 12(3.5,-0.325) 13(3.5,0.325) 14(3.5,0.975) 15(3.5,1.625) 16(3.5,2.275)
  silkscreen extent -3.63,-3.25 1.9,3.25, body extent -2.7,-3.25 2.7,3.25, height 2
"SW TACT" [mil]
  rect 100x42 smd: 1(-150,0) 2(150,0)
  silkscreen extent -112,-63 112,63
TSQFP50P1600X1600X160-100N [mm] "TSQFP, 100-Leads, Body 16.2x16.2mm (max), Pitch 0.50mm, IPC Medium Density"
  rect 1.75x0.23 smd: 1(-7.575,6) 2(-7.575,5.5) 3(-7.575,5) 4(-7.575,4.5) 5(-7.575,4) 6(-7.575,3.5) 7(-7.575,3) 8(-7.575,2.5) 9(-7.575,2) 10(-7.575,1.5) 11(-7.575,1) 12(-7.575,0.5) 13(-7.575,0) 14(-7.575,-0.5) 15(-7.575,-1) 16(-7.575,-1.5) 17(-7.575,-2) 18(-7.575,-2.5) 19(-7.575,-3) 20(-7.575,-3.5) 21(-7.575,-4) 22(-7.575,-4.5) 23(-7.575,-5) 24(-7.575,-5.5) 25(-7.575,-6) 51(7.575,-6) 52(7.575,-5.5) 53(7.575,-5) 54(7.575,-4.5) 55(7.575,-4) 56(7.575,-3.5) 57(7.575,-3) 58(7.575,-2.5) 59(7.575,-2) 60(7.575,-1.5) 61(7.575,-1) 62(7.575,-0.5) 63(7.575,0) 64(7.575,0.5) 65(7.575,1) 66(7.575,1.5) 67(7.575,2) 68(7.575,2.5) 69(7.575,3) 70(7.575,3.5) 71(7.575,4) 72(7.575,4.5) 73(7.575,5) 74(7.575,5.5) 75(7.575,6)
  rect 0.23x1.75 smd: 26(-6,-7.575) 27(-5.5,-7.575) 28(-5,-7.575) 29(-4.5,-7.575) 30(-4,-7.575) 31(-3.5,-7.575) 32(-3,-7.575) 33(-2.5,-7.575) 34(-2,-7.575) 35(-1.5,-7.575) 36(-1,-7.575) 37(-0.5,-7.575) 38(0,-7.575) 39(0.5,-7.575) 40(1,-7.575) 41(1.5,-7.575) 42(2,-7.575) 43(2.5,-7.575) 44(3,-7.575) 45(3.5,-7.575) 46(4,-7.575) 47(4.5,-7.575) 48(5,-7.575) 49(5.5,-7.575) 50(6,-7.575) 76(6,7.575) 77(5.5,7.575) 78(5,7.575) 79(4.5,7.575) 80(4,7.575) 81(3.5,7.575) 82(3,7.575) 83(2.5,7.575) 84(2,7.575) 85(1.5,7.575) 86(1,7.575) 87(0.5,7.575) 88(0,7.575) 89(-0.5,7.575) 90(-1,7.575) 91(-1.5,7.575) 92(-2,7.575) 93(-2.5,7.575) 94(-3,7.575) 95(-3.5,7.575) 96(-4,7.575) 97(-4.5,7.575) 98(-5,7.575) 99(-5.5,7.575) 100(-6,7.575)
  silkscreen extent -7.7,-6.3 6.3,6.82, body extent -7,-7 7,7, height 1.6

## Part data
C1 C2 C3 C4 C5 C6 C7 C8 C9 C10 C11 C12 C13 C14 C18 C19 C20 C21 C22 C23 C24 C25 C26 C27 C28 C29 C30 C31 C33 C34 C35 C38 C40 C41 C42 C43 C44 C45 C46 C47 C48 C49 C50 C51 C52 C53: library part Cap_SMT, "CAP CER 0.1UF 16V Y5V 0402"
C15: "CAP TANTA"
C16 C17 C32 C37 C39: library part Cap_TANTA, "CAP TANTA"
C36: library part Cap_ALU, "CAP ALU"
D1 D2 D3 D4 D5 D6 D7 D8 D9 D10 D11 D12: library part "D Schottky", "DIODE SCHOTTKY 40V 3A SMA"
J1: library part "Header 6"
J2 J3: library part SMA-R/A-F, "SMA-R/A-F"
J4 J5 J6 J7 J8 J9 J10 J11 J12 J13 J15 J16 J17 J18 J19 J20 J21 J22 J23: library part "Header 2", "Header, 2-Pin"
J14: library part "uSD Push-Push Socket"
L1: library part Inductor, "INDUCTOR POWER 68UH SMD"
LED1 LED2 LED3 LED4: library part LED, "LED GREEN 0.2MM 13MCD 0402 SMD"
P2: "Header, 10-Pin"
PPTC1: library part "Fuse 2", "POLYSWITCH .50A RESET FUSE SMD"
Q1 Q2 Q7 Q8: library part "MOSFET-P GSD", "MOSFET P-CH 50V 130MA SOT23-3"
Q3 Q4 Q5 Q6: library part "NPN BEC", "TRANSISTOR NPN 50V 150MA"
R1 R2 R3 R4 R7 R8 R9 R11: library part R_SMD1, "Resistor SMD 1%"
R5 R6 R10 R12 R13 R14 R15 R16 R17 R18 R19 R20 R21 R22 R23 R24 R25 R26: library part R_SMD5, "Resistor SMD 5%"
U1: library part "Battery Holder"
U3: library part XC6209B, "IC REG LDO 3.3V .3A SOT-25"
U9: "AutomotiveHall Effect-Based Linear Current Sensor"
U10: "IC REG BUCK ADJ 1A 8SOIC"
X1: "Tuning Forl Crystal Units (SMD-Cylinder Type)"
Y1: library part CRYSTAL-SMT, "NX3225SA-12MHZ-STD-CSR-6"

## Via types
v1: diameter 50, hole 28, Top Layer to Bottom Layer, 101 vias
v2: diameter 40, hole 24, Top Layer to Bottom Layer, 2 vias

## Nets (pads, with @x,y where several pads share a name; then routed paths per layer and width w, separated by ;. In a path a pad name is that pad's centre, name@x,y a point inside that pad or via, vN(x,y) a via of type N, cw(c..) or ccw(c..) an arc to the next point about the centre after c; other vN are vias at no path point)
3V3: C20.2 C23.2 C24.2 C27.2 C39.1 C40.2 C42.2 C51.2 J11.1 J11.2 P2.1 Q1.2 Q2.2 Q7.2 Q8.2 R5.1 R6.1 R19.1 R26.1 U5.1 U8.3 U8.7 U8.8 U11.2 U11.4 | length 10230.8
  Top Layer w20: v1(1255,2225) 1255,2540 1390,2675 1390,3045 1445,3100 2600,3100 ; v1(2290,2800) 2425,2935 2555,2935 2600,2980 2600,3100 ; R26.1@2600,1930 2600,1915 2625,1890 2698.66,1890 Q8.2@2737.4,1928.74 2740.22,1931.56 C51.2@2795,1931.56 3233.03,1931.56 C39.1@3375,2073.53 3588.53,2073.53 U11.4@3625,2110 ; P2.1@3025,1250 3025,1145 3075,1095 3245,1095 3453.86,1303.86 v1(3533.86,1303.86) 3591,1361 C40.2@3591,1785 3625,1819 U11.2@3625,1885.59 U11.4@3625,2110 ; J11.1@3100,3010 3010,3100 2600,3100 ; v1(3625,2250) U11.4@3625,2110
  Bottom Layer w15: U8.7@834.25,1800 785,1800 767.04,1782.04 767.04,1672.96 785,1655 905,1655 1000,1750 U8.3@1115.75,1750 ; C23.2@1112.8,2216.24 U5.1@1112.8,2164.57 1189.57,2164.57 v1@1250,2225
  Bottom Layer w20: U8.7@834.25,1800 U8.8@834.25,1850 834.25,1909.25 C27.2@835,1910 900,1910 920,1930 920,2095 1041.24,2216.24 1112.8,2216.24 C23.2@1116.56,2220 ; v1@1250,2225 v1(1255,2225) ; C24.2@2190,2580 R6.1@2260,2580 2252.6,2587.4 Q2.2@2252.6,2648.74 2263.74,2648.74 2330,2715 2330,2775 2305,2800 v1(2290,2800) ; J11.1@3100,3010 J11.2@3300,3010 3410,3120 3765,3120 3805,3080 3805,2935 ; R19.1@3410,2832.44 3422.56,2845 3511.14,2845 Q7.2@3557.4,2891.26 3557.66,2891 C42.2@3620,2891 3664,2935 3805,2935 ; v1(3533.86,1303.86) 3540,1303.86 Q1.2@3631.26,1212.6 3631.26,1153.74 C20.2@3635,1150 R5.1@3700,1150 ; v1(3625,2250) 3890,2515 3890,2880 3835,2935 3805,2935
5V: C15.1 C18.2 C30.2 C32.1 C35.2 C41.2 C45.2 C46.2 D3.1 D7.1 J12.1 J12.2 L1.2 R9.2 R10.2 U3.1 U3.3 U6.1 U9.8 U11.3 U14.8 U15.16 | length 12392.9
  Top Layer w15: v1(2550,560) 3035,560 v1(3090,615)
  Top Layer w20: 2469,956 2525,900 C35.2@2525,778.44 ; L1.2@2811.61,850 2811.61,763.39 2840,735 3200,735 3235,770 3305,770 3338.44,803.44 R9.2@3375,803.44 ; v1(3825,610) C30.2@3825,671.56 3828.44,675 U9.8@3953.54,675
  Top Layer w40: v1(615,2670) 615,3085 685,3155 3355,3155 J12.1@3500,3010 ; v1(2255,860) 2255.43,859.57 D7.1@2325,859.57 2421.43,956 R10.2@2450,956 ; 2469,956 R10.2@2450,956 ; L1.2@2811.61,850 2811.61,958.39 2781.47,988.53 C32.1@2650,988.53 ; J12.2@3700,3010 3700,2900 3895,2705 3895,2095 ; v1(3835,2095) 3895,2095 ; R10.2@2450,956 2482.53,988.53 C32.1@2650,988.53 ; C32.1@2650,988.53 3273.58,988.53 3520.05,1235 3620,1235 3715,1330 3715,1745 3715.55,1745.55 U11.3@3715.55,1885.59 3775.59,1885.59 3895,2005 3895,2095
  Bottom Layer w10: C15.1@3030,1910 C15.1@3040,1920 ; U3.1@3052.6,1777.24 3052.6,1747.4 3070,1730 3110,1730 3127.4,1747.4 U3.3@3127.4,1777.24
  Bottom Layer w15: v1(2255,860) 2205,810 2205,715 ; U14.8@2325,610 C45.2@2250,610 2235,610 2205,640 2205,715 ; v1(2550,560) 2550,611.26 ; U15.16@2675,610 C46.2@2600,610 2598.74,611.26 2550,611.26 ; C18.2@3030,1850 3052.6,1827.4 U3.1@3052.6,1777.24 ; v1@3095,610 v1(3825,610) ; 2205,715 2435,715 2538.74,611.26 2550,611.26
  Bottom Layer w20: C18.2@3030,1850 C15.1@3030,1910 ; C15.1@3040,1920 3040,1955 3180,2095 v1(3835,2095)
  Bottom Layer w40: v1(615,2670) D3.1@615,2600 615,2585 685,2515 685,2345 U6.1@650,2310 ; v1(3090,615) v1@3095,610 ; J12.1@3500,3010 J12.2@3700,3010
485_RW: U2.85 U14.2 U14.3 | length 950
  Bottom Layer w8: U14.2@2375,795.04 U14.3@2425,795.04 2425,900 2457,932 2457,972.46 2615,1130.46 2615,1187.12 2575,1227.12 2575,1295 2468,1402 2468,1417 2452,1433 2416.2,1433 2389.06,1460.14 U2.85@2389.06,1501.77
A: J21.2 R22.1 U14.6 | length 261.8
  Bottom Layer w20: J21.2@2300,400 2300,405 2372.44,477.44 R22.1@2372.44,490 2372.44,512.44 2425,565 U14.6@2425,610
AI00: J4.1 U2.25 | length 2383.5
  Bottom Layer w10: J4.1@300,3010 492,2818 1637,2818 1910,2545 1910,2513.73 2032.68,2391.04 2032.68,2157.68 2017,2142 2017,2036.22 U2.25@2031.77,2036.22
AI01: J4.2 U2.26 | length 2140.4
  Bottom Layer w10: J4.2@500,3010 674,2836 1644.46,2836 1928,2552.46 1928,2521.18 2055,2394.18 2055,2175 2093.78,2136.22 U2.26@2093.78,2098.23
AI02: J5.1 U2.29 | length 1979.8
  Bottom Layer w10: J5.1@700,3010 856,2854 1651.91,2854 1946,2559.91 1946,2528.64 2152.83,2321.8 U2.29@2152.83,2098.23
AI03: J5.2 U2.30 | length 1802.9
  Bottom Layer w10: J5.2@900,3010 1038,2872 1659.37,2872 1964,2567.37 1964,2536.09 2172.52,2327.57 U2.30@2172.52,2098.23
AI04: J6.1 U2.31 | length 1625.9
  Bottom Layer w10: J6.1@1100,3010 1220,2890 1666.82,2890 1982,2574.82 1982,2543.55 2192.2,2333.34 U2.31@2192.2,2098.23
AI05: J6.2 U2.32 | length 1449
  Bottom Layer w10: J6.2@1300,3010 1402,2908 1674.28,2908 2000,2582.28 2000,2551.01 2211.89,2339.12 U2.32@2211.89,2098.23
B: J21.1 R22.2 U14.7 | length 754.1
  Bottom Layer w20: U14.7@2375,610 2375,570 2225,420 2225,370 2270,325 2425,325 J21.1@2500,400 2419.22,480.78 R22.2@2428.44,490
BLE_EN: Q1.1 R5.2 U2.66 | length 1697.8
  Bottom Layer w8: U2.66@2628.23,1740.94 2710.96,1740.94 2714.91,1737 2793,1737 2900,1630 2900,1529.59 3371.59,1058 3659.97,1058 3731,1129.03 3731,1175 R5.2@3700,1206 3700,1260 3672.6,1287.4 Q1.1@3631.26,1287.4
BLE_RST: U2.67 U4.11 | length 1902.7
  Bottom Layer w8: U2.67@2628.23,1721.26 2628.49,1721 2786.37,1721 2884,1623.37 2884,1522.96 3364.96,1042 3666.6,1042 3750,1125.4 3750,1240 3665,1325 3570,1325 3527.6,1367.4 U4.11@3527.6,1383.85
BOOT0: R2.1 R3.1 U2.94 | length 199
  Bottom Layer w8: R2.1@2121,1375 R3.1@2180,1375 2211.89,1406.89 U2.94@2211.89,1501.77
CURRENT: C29.2 D4.2 U2.23 U9.7 | length 2742.4
  Top Layer w10: v1(2155,1975) 2180,1975 2275,1880 2275,1744.54 2299.54,1720 2340.8,1720 2360.8,1700 2395,1700 2420,1675 2420,1639.54 2457,1602.54 2457,1553 2559,1451 2948.54,1451 3120,1279.54 v1(3120,1145) ; v1(3890,725) U9.7@3953.54,725
  Bottom Layer w8: C29.2@3760,821.56 3760,765 3799.73,725.27 D4.2@3830,725.27
  Bottom Layer w10: U2.23@2031.77,1996.85 2070.94,1996.85 2092.8,1975 v1(2155,1975) ; v1(3120,1145) 3120,1055 3353.44,821.56 C29.2@3760,821.56 ; D4.2@3830,725.27 3830.27,725 v1(3890,725)